# Altium PCB AD5940PSTAT.PcbDoc
Units mm, origin at the board's own origin, x right, y up, seen from the top; angles counter-clockwise.
Board outline 27 x 27 mm, 2 copper layers (Top Layer, Bottom Layer); 70 components, 59 nets, 300 pads, 134 vias.
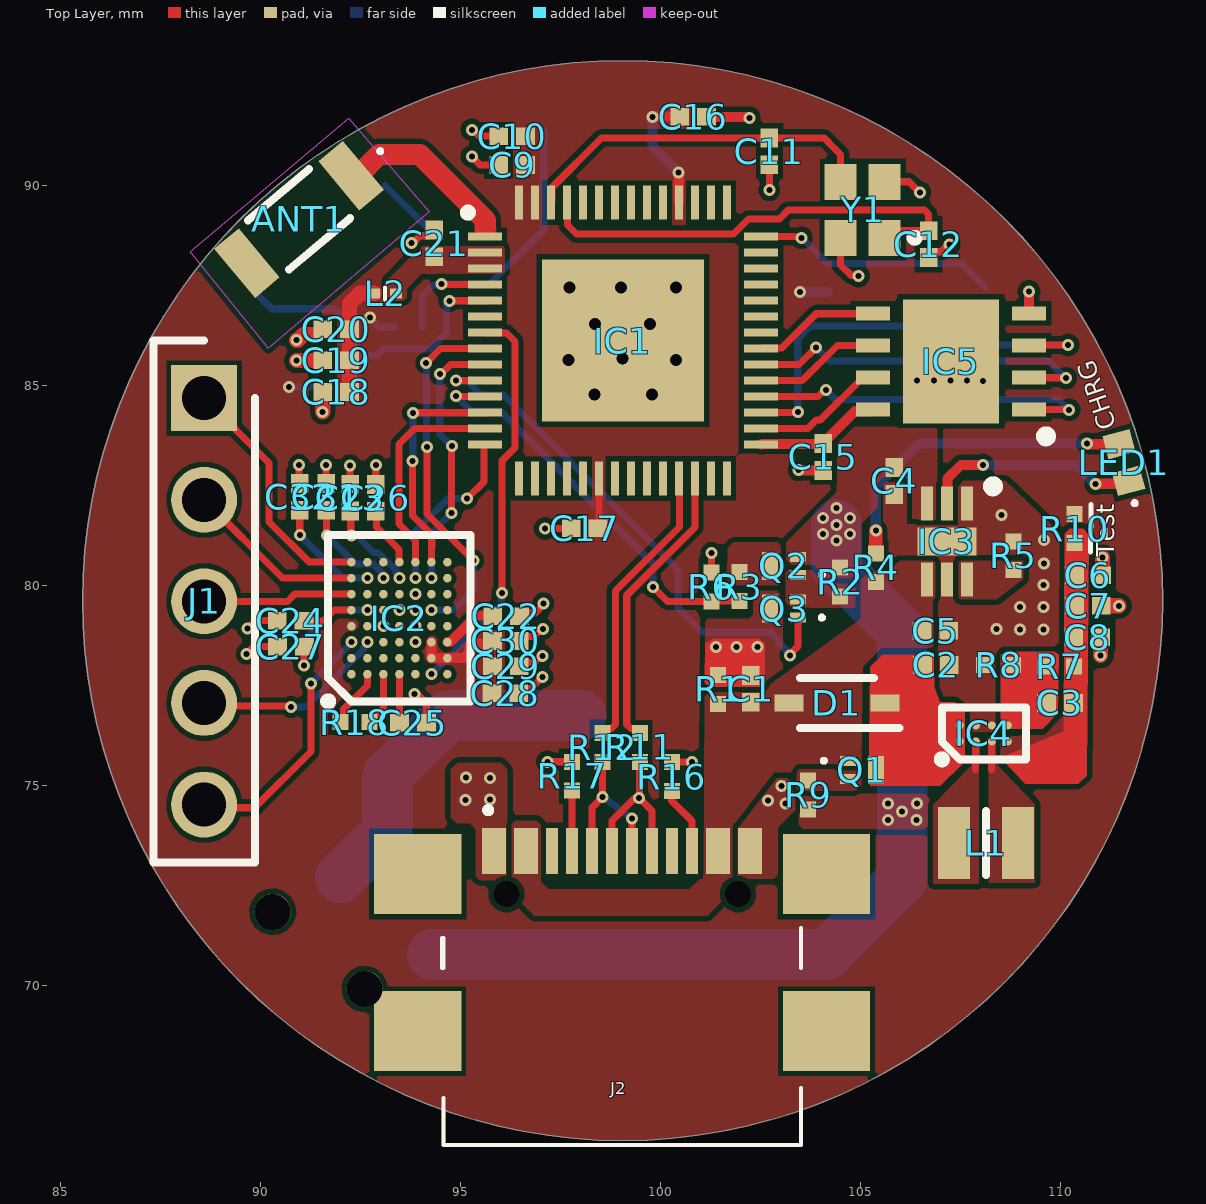
[diagram p0: Top Layer view]
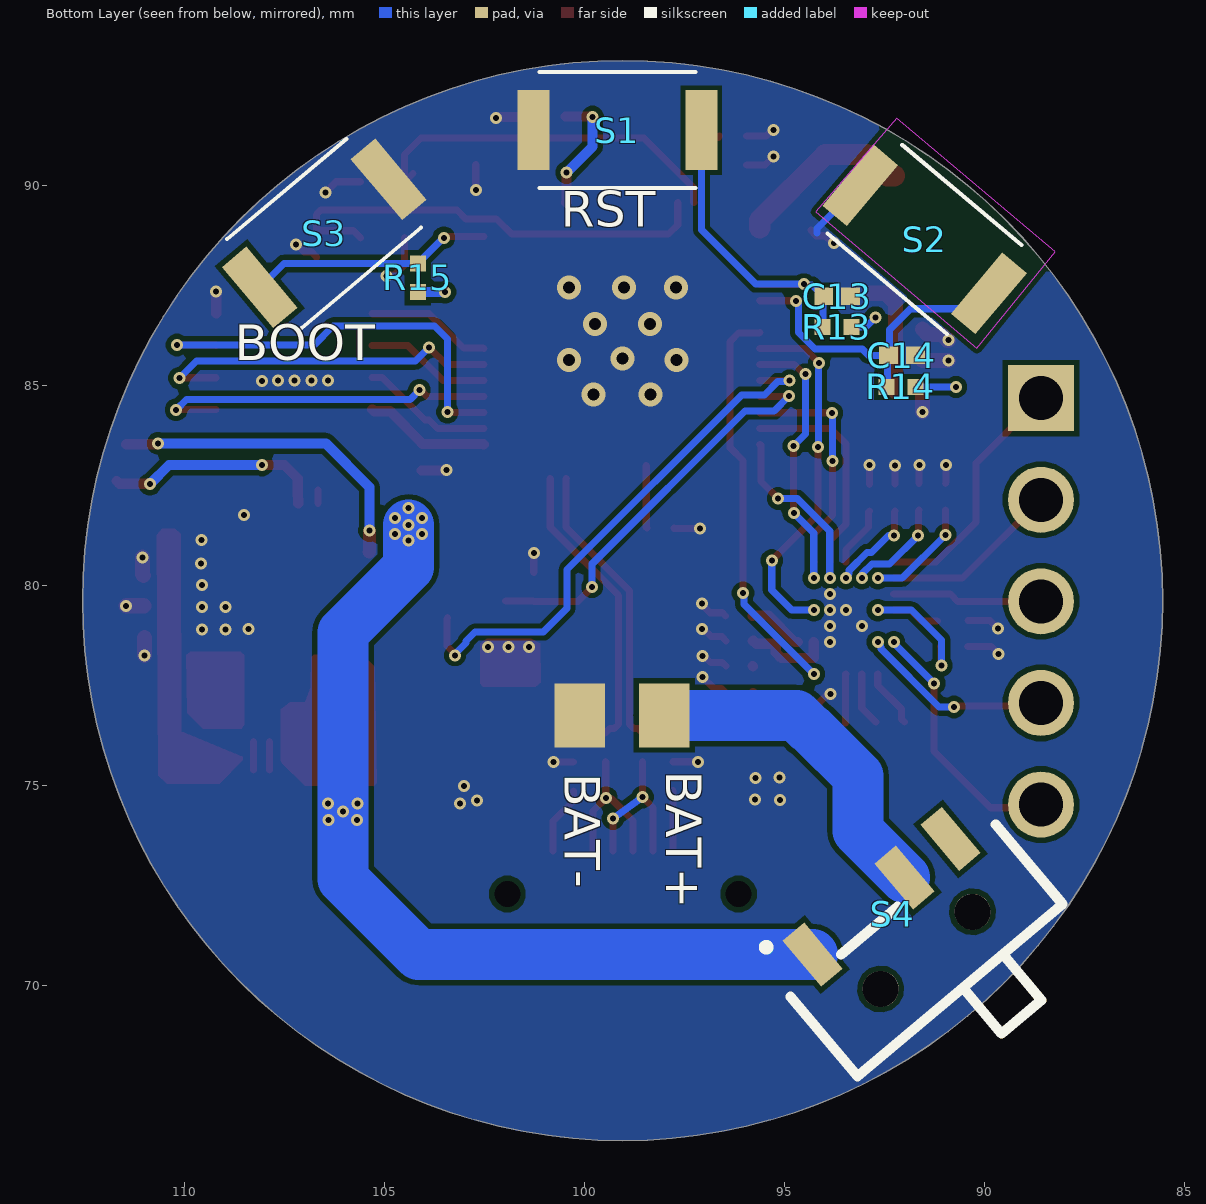
[diagram p1: Bottom Layer view, seen from below]
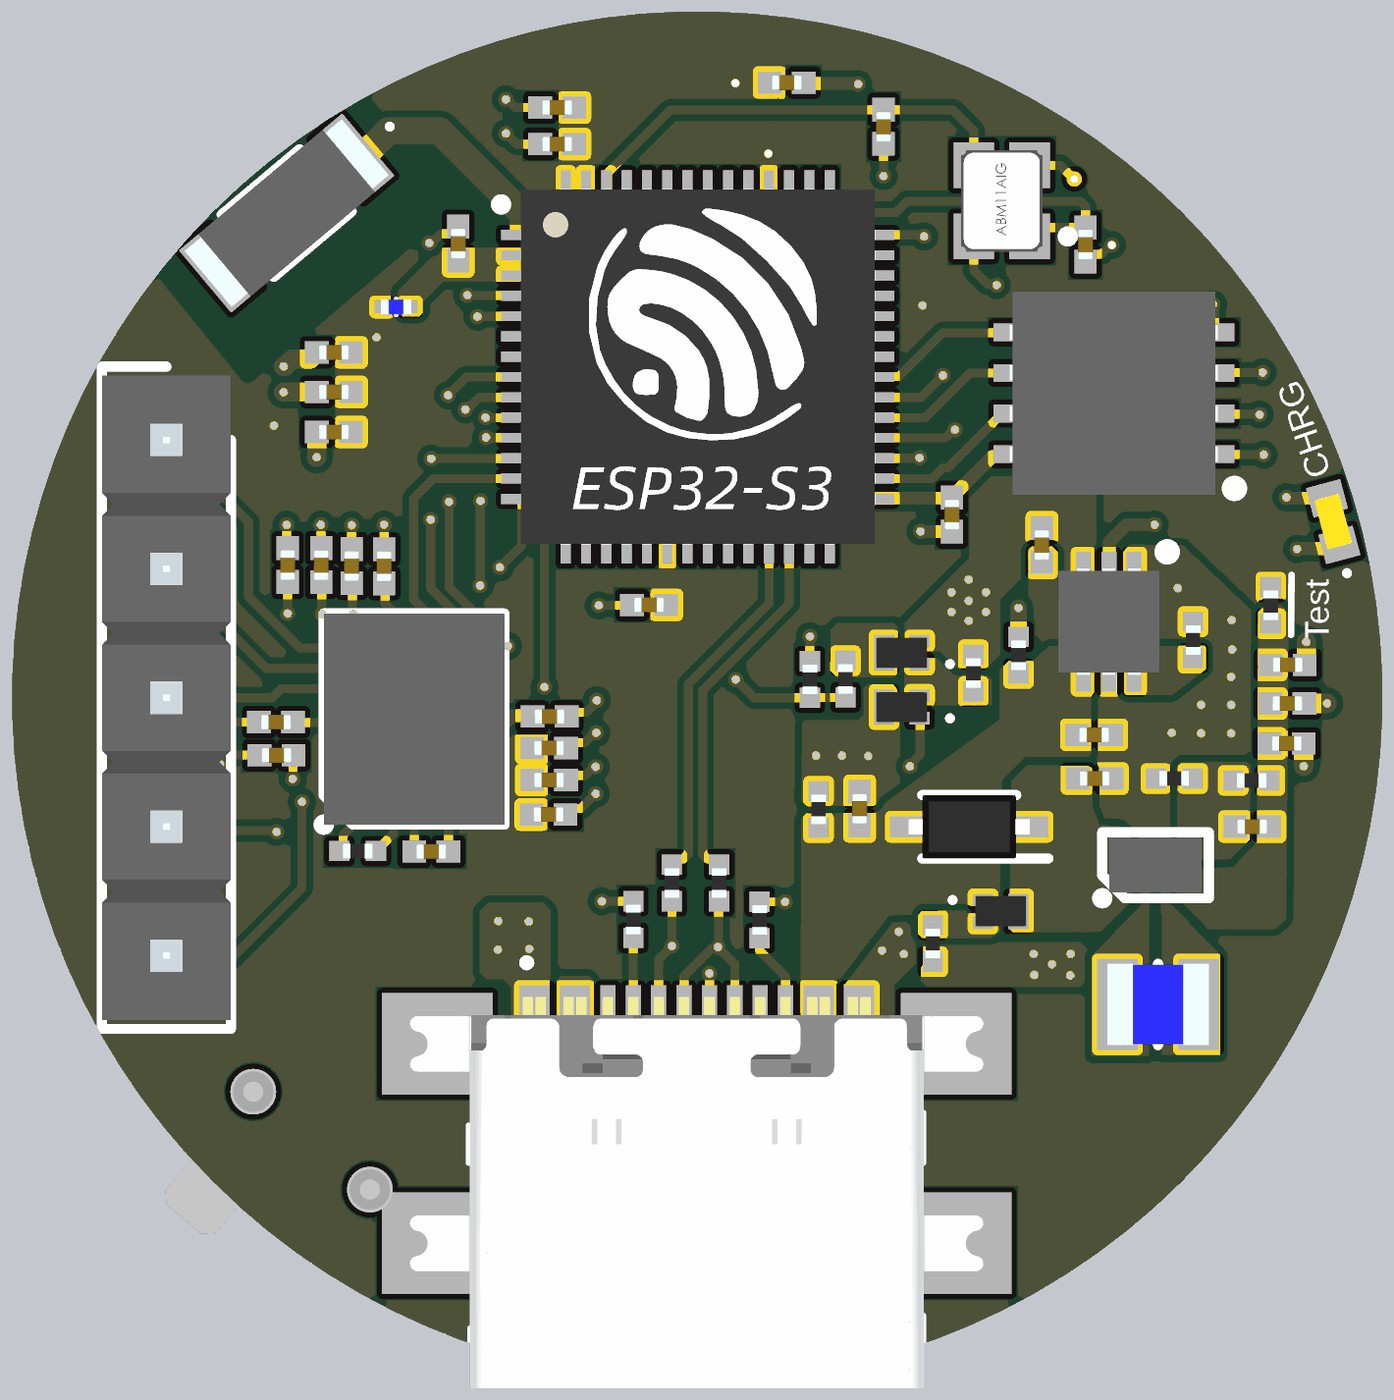
[diagram p2: 3D render of the assembled board from above, using the file's embedded part models]
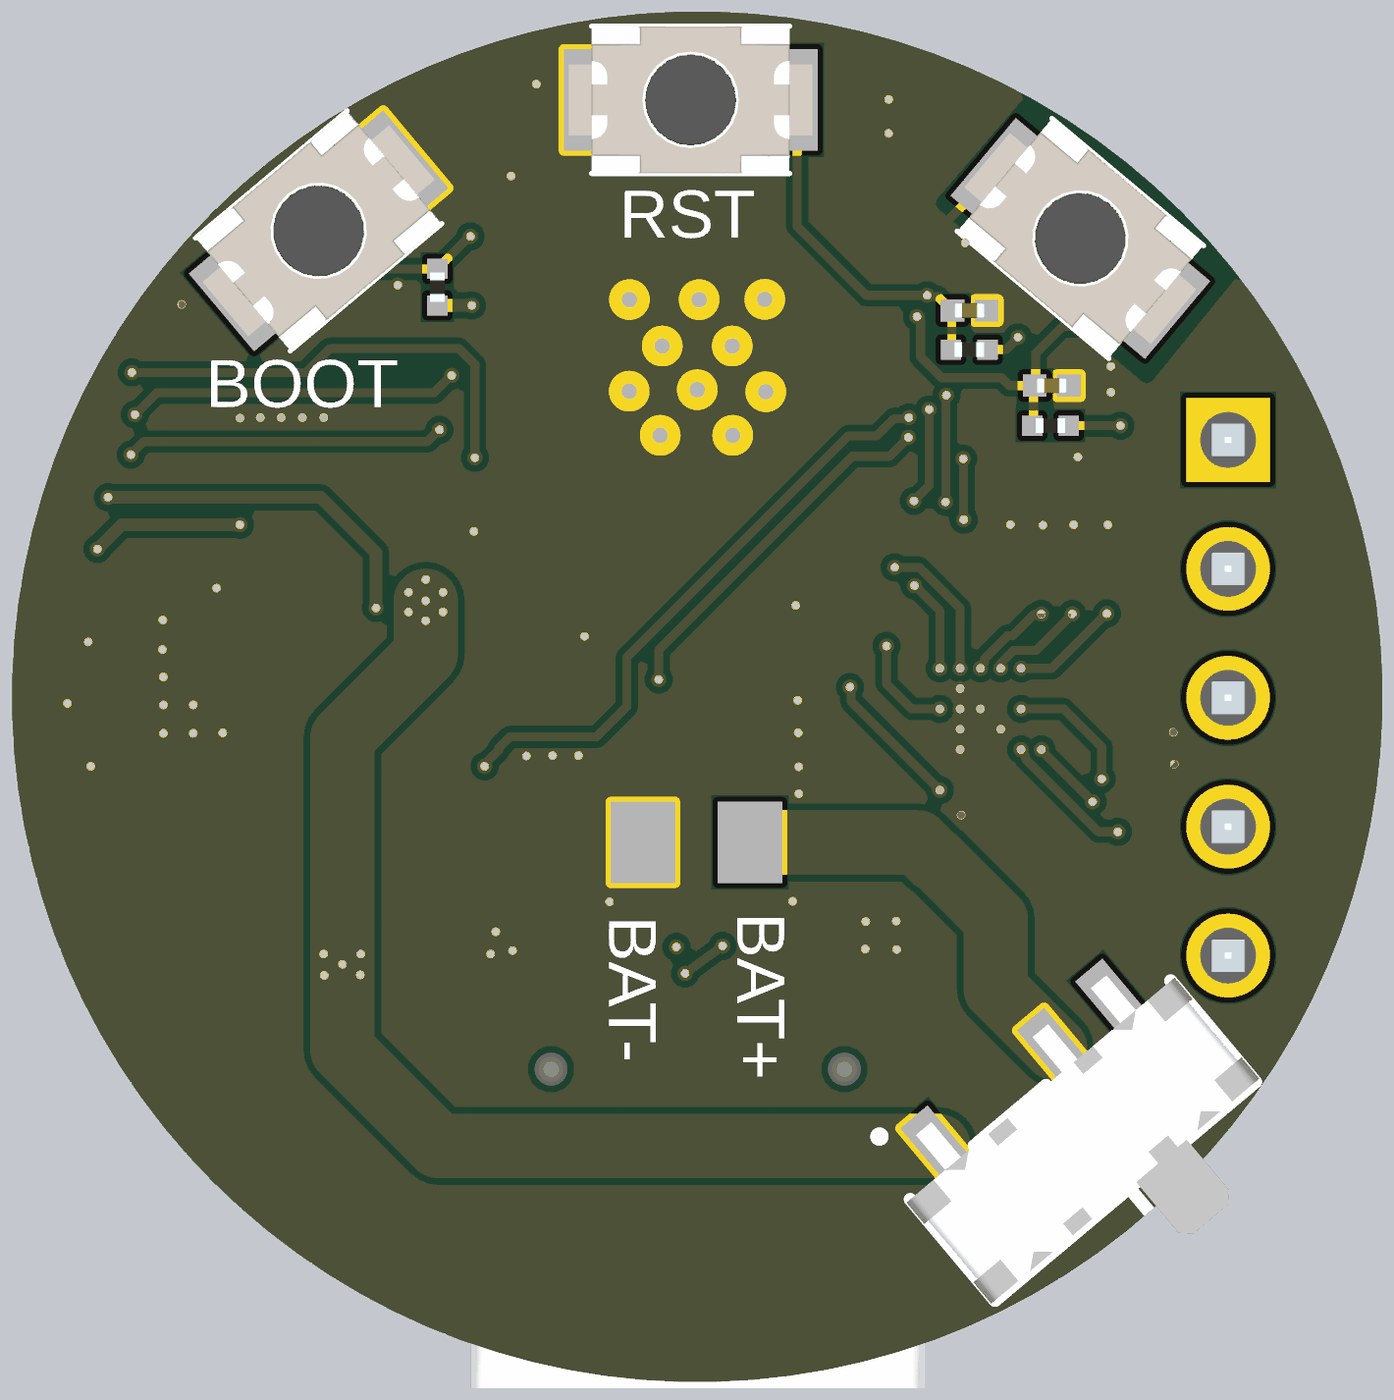
[diagram p3: 3D render of the assembled board from below, using the file's embedded part models]

## Layer stack, top to bottom
Top Solder: solder mask 0.0102, Solder Resist, Dk 3.5
Top Layer: signal copper 0.0356
Dielectric 1: dielectric 0.32, FR-4, Dk 4.8
Bottom Layer: signal copper 0.0356
Bottom Solder: solder mask 0.0102, Solder Resist, Dk 3.5

## Board outline
85.56,79.629 ccw(c99.06,79.629) 99.06,66.129 ccw(c99.06,79.629) 112.56,79.629 ccw(c99.06,79.629) 99.06,93.129 ccw(c99.06,79.629)

## Design rules (kind name [scope] priority, off if disabled: settings)
Clearance [All] p1: gap=0.127 ignorepadtopadclearanceinfootprint=FALSE
DiffPairsRouting [All] p1: maxlimit=0.254 minlimit=0.076 mostfreqgap=0.102 toplayer_minwidth=0.178 toplayer_maxwidth=0.178 toplayer_prefwidth=0.178 bottomlayer_minwidth=0.178 bottomlayer_maxwidth=0.178 bottomlayer_prefwidth=0.178 maxuncoupledlength=12.7
PlaneClearance [All] p1: clearance=0.127
PolygonConnect [All] p1: connectstyle=Direct reliefconductorwidth=0.254 reliefentries=4 polygonreliefangle="90 Angle" airgapwidth=0.254
RoutingVias [All] p1: holewidth=0.711 width=1.27 viastyle="Through Hole" minholewidth=0.711 minwidth=1.27 maxholewidth=0.711 maxwidth=1.27
SolderMaskExpansion [All] p1: expansion=0.102 istentingtop=FALSE
SupplyNets "Schematic Supply Nets" [InNet('GND')] p1: voltage=0.000
Width [All] p1: maxlimit=0.254 minlimit=0.076 preferedwidth=0.254 minimp=50.000000 maximp=50.000000 favimp=50.000000
28 further rules are at their usual default settings.

## Classes and differential pairs
component class AD5940: C22 C23 C24 C25 C26 C27 C28 C29 C30 C31 C32 IC2 J1 R18
component class AD5940PSTAT: ANT1 C9 C10 C11 C12 C13 C14 C15 C16 C17 C18 C19 C20 C21 IC1 IC5 J2 L2 R11 R12 R13 R14 R15 R16 R17 S1 S2 S3 Y1
component class Battery_MGMT: C1 C2 C3 C4 C5 C6 C7 C8 D1 IC3 IC4 L1 LED1 Q1 Q2 Q3 R1 R2 R3 R4 R5 R6 R7 R8 R9 R10 S4
differential pair ESP32_D: +ESP32_D_P -ESP32_D_N

## Components (designator, comment, footprint, x,y, rotation, side; value= is the part's Value field where it differs from the comment)
ANT1 "2450AT18A0100001E" 2450AT18A0100001E 90.97,89.16 r40 top
C1 "100nF 0201" CAPC0603X33N 102.26,77.425 r90 top
C2 "10uF 0201" CAPC0603X33N 106.89,78.02 r0 top
C3 "10pF 0201" CAPC0603X33N 109.995,77.07 r180 top
C4 "1uF 0201" CAPC0603X33N 105.85,82.62 r270 top
C5 "1uF 0201" CAPC0603X33N 106.88,78.88 r0 top
C6 "10uF 0201" CAPC0603X33N 110.695,80.26 r0 top
C7 "10uF 0201" CAPC0603X33N 110.689,79.498 r0 top
C8 "10uF 0201" CAPC0603X33N 110.675,78.71 r0 top
C9 "1uF 0201" CAPC0603X33N 96.3,90.52 r180 top
C10 "10nF 0201" CAPC0603X33N 96.3,91.24 r180 top
C11 "10pF 0201" CAPC0603X33N 102.73,90.86 r270 top
C12 "10pF 0201" CAPC0603X33N 106.71,88.54 r90 top
C13 "1uF 0201" CAPC0603X33N 93.695,87.24 r180 bottom
C14 "10pF 0201" CAPC0603X33N 92.075,85.76 r180 bottom
C15 "100nF 0201" CAPC0603X33N 104.08,83.22 r90 top
C16 "100nF 0201" CAPC0603X33N 100.825,91.73 r0 top
C17 "100nF 0201" CAPC0603X33N 98.11,81.44 r180 top
C18 "2.2uF 0201" CAPC0603X33N 91.9,84.845 r180 top
C19 "2.2uF 0201" CAPC0603X33N 91.9,85.635 r180 top
C20 "100nF 0201" CAPC0603X33N 91.9,86.415 r180 top
C21 "100nF 0201" CAPC0603X33N 94.35,88.56 r90 top
C22 "0.47uF 0201" CAPC0603X33N 96.15,79.24 r180 top
C23 "0.47uF 0201" CAPC0603X33N 92.25,82.205 r270 top
C24 "4u7F 0201" CAPC0603X33N 90.76,79.13 r0 top
C25 "0.47uF 0201" CAPC0603X33N 93.82,76.58 r180 top
C26 "0.47uF 0201" CAPC0603X33N 92.89,82.2 r270 top
C27 "220pF 0201" CAPC0603X33N 90.77,78.48 r0 top
C28 "10uF 0201" CAPC0603X33N 96.13,77.31 r180 top
C29 "0.1uF 0201" CAPC0603X33N 96.14,77.99 r180 top
C30 "0.1uF 0201" CAPC0603X33N 96.14,78.62 r180 top
C31 "0.1uF 0201" CAPC0603X33N 91.65,82.223 r270 top
C32 "1uF 0201" CAPC0603X33N 90.99,82.225 r270 top
D1 "RB551V-30-AU_R1_000A1" SODFL2512X90N 104.419,77.068 r180 top
IC1 "ESP32-S3" QFN40P700X700X90-57N-D 99.069,86.13 r0 top
IC2 "AD5940BCBZ-RL7" BGA56C40P8X7_416X356X55 93.48,79.19 r90 top
IC3 "LTC4065LEDC#TRMPBF" SON50P200X200X80-7N-D 107.17,81.11 r270 top
IC4 "TPS63036YFGR" BGA8C40P2X4_108X181X62 108.09,76.31 r90 top
IC5 "W25Q64JVXGIQ_TR" SON80P400X400X50-9N 107.27,85.61 r180 top
J1 "M20-9990546" HDRV5W64P0X254_1X5_1270X254X610P 88.6,84.69 r270 top
J2 "USB4110-GF-A" USB4110GFA 99.05,69.69 r0 top
L1 "DFE201612PD-1R5M=P2" 1286ASH1R0MP2 108.139,73.568 r0 top
L2 "2nH 0201" LQP03TG3N1B02D 93.125,87.31 r0 top
LED1 "VLMO1500-GS08" VLMO1500GS08 111.59,83.08 r105 top
Q1 "PMZ350UPEYL" PMZ350UPEYL 105.04,75.4 r0 top
Q2 "PMZ350UPEYL" PMZ350UPEYL 103.09,80.5 r180 top
Q3 "PMZ350UPEYL" PMZ350UPEYL 103.09,79.43 r180 top
R1 "100k 0201" RESC0603X28N 101.45,77.41 r90 top
R2 "100k 0201" RESC0603X28N 104.5,80.095 r270 top
R3 "100k 0201" RESC0603X28N 101.98,79.98 r270 top
R4 "500R 0201" RESC0603X28N 105.39,80.45 r90 top
R5 "2k 0201" RESC0603X28N 108.83,80.75 r90 top
R6 "10k 0201" RESC0603X28N 101.28,79.97 r90 top
R7 "287k 0201" RESC0603X28N 109.98,77.98 r180 top
R8 "51.1k 0201" RESC0603X28N 108.46,78.02 r180 top
R9 "0R 0201" RESC0603X28N 103.7,74.77 r90 top
R10 "0R 0201" RESC0603X28N 110.36,81.43 r90 top
R11 "22R 0201" RESC0603X28N 99.49,75.96 r90 top
R12 "22R 0201" RESC0603X28N 98.56,75.96 r90 top
R13 "10k 0201" RESC0603X28N 93.7,86.47 r180 bottom
R14 "10k 0201" RESC0603X28N 92.1,84.97 r180 bottom
R15 "10k 0201" RESC0603X28N 104.18,87.7 r270 bottom
R16 "5k1 0201" RESC0603X28N 100.29,75.23 r270 top
R17 "5k1 0201" RESC0603X28N 97.8,75.24 r270 top
R18 "200R 0201" RESC0603X28N 92.37,76.59 r180 top
S1 "SKRKAHE020" SKRKAEE020 99.19,91.39 r180 bottom
S2 "SKRKAHE020" SKRKAEE020 91.511,88.66 r220 bottom
S3 "SKRKAHE020" SKRKAEE020 106.52,88.81 r320 bottom
S4 "SSSS810701" SSSS810701 92.011,72.707 r140 bottom
Y1 "ABM11AIG-40.000MHZ-4Z-T3" ABM11AIG16000MHZ81ZT 105.06,89.4 r90 top

## Footprints (in the part's own frame and the unit in brackets; to place one, negate y for a bottom-side part, rotate by r counter-clockwise, add the part's x,y. Pads: shape width x height; smd on the part's side, far side on the other; paste and mask are expansions set on the pad)
1286ASH1R0MP2 [mm]
  rect 0.8x1.8 smd: 1(-0.8,0) 2(0.8,0)
  silkscreen extent 0,-0.8 0,0.8, body extent -1,-0.8 1,0.8, height 1.2
2450AT18A0100001E [mm]
  rect 0.8x1.6 smd: 1(1.7,0) 2(-1.7,0)
  silkscreen extent -1,-0.8 2.7,0.8, body extent -2.02,-0.8 2.02,0.8, height 1.5
ABM11AIG16000MHZ81ZT [mm]
  rect 0.9x0.8 smd: 1(-0.7,-0.55) 2(0.7,-0.55) 3(0.7,0.55) 4(-0.7,0.55)
  silkscreen extent -0.8,-1.4 -0.6,-1.2, body extent -1,-0.8 1,0.8, height 0.55
BGA8C40P2X4_108X181X62 [mm]
  round 0.2 smd: A1(-0.2,0.6) A2(0.2,0.6) B1(-0.2,0.2) B2(0.2,0.2) C1(-0.2,-0.2) C2(0.2,-0.2) D1(-0.2,-0.6) D2(0.2,-0.6)
  silkscreen extent -0.75,-1.05 0.65,1.15, body extent -0.54,-0.91 0.54,0.91, height 0.63
BGA56C40P8X7_416X356X55 [mm]
  round 0.214 smd: A1(-1.4,1.2) A2(-1,1.2) A3(-0.6,1.2) A4(-0.2,1.2) A5(0.2,1.2) A6(0.6,1.2) A7(1,1.2) A8(1.4,1.2) B1(-1.4,0.8) B2(-1,0.8) B3(-0.6,0.8) B4(-0.2,0.8) B5(0.2,0.8) B6(0.6,0.8) B7(1,0.8) B8(1.4,0.8) C1(-1.4,0.4) C2(-1,0.4) C3(-0.6,0.4) C4(-0.2,0.4) C5(0.2,0.4) C6(0.6,0.4) C7(1,0.4) C8(1.4,0.4) D1(-1.4,0) D2(-1,0) D3(-0.6,0) D4(-0.2,0) D5(0.2,0) D6(0.6,0) D7(1,0) D8(1.4,0) E1(-1.4,-0.4) E2(-1,-0.4) E3(-0.6,-0.4) E4(-0.2,-0.4) E5(0.2,-0.4) E6(0.6,-0.4) E7(1,-0.4) E8(1.4,-0.4) F1(-1.4,-0.8) F2(-1,-0.8) F3(-0.6,-0.8) F4(-0.2,-0.8) F5(0.2,-0.8) F6(0.6,-0.8) F7(1,-0.8) F8(1.4,-0.8) G1(-1.4,-1.2) G2(-1,-1.2) G3(-0.6,-1.2) G4(-0.2,-1.2) G5(0.2,-1.2) G6(0.6,-1.2) G7(1,-1.2) G8(1.4,-1.2)
  silkscreen extent -2.18,-1.78 2.08,1.88, body extent -2.08,-1.78 2.08,1.78, height 0.55
CAPC0603X33N [mm]
  rect 0.47x0.44 smd: 1(-0.335,0) 2(0.335,0)
  body extent -0.3,-0.15 0.3,0.15, height 0.33
HDRV5W64P0X254_1X5_1270X254X610P [mm]
  rect 1.65x1.65 hole 1.1: 1(0,0)
  round 1.65 hole 1.1: 2(2.54,0) 3(5.08,0) 4(7.62,0) 5(10.16,0)
  silkscreen extent -1.45,-1.27 11.61,1.27, body extent -1.27,-1.27 11.43,1.27, height 6.1
LQP03TG3N1B02D [mm]
  rect 0.3x0.25 smd: 1(-0.275,0) 2(0.275,0)
  silkscreen extent 0,-0.15 0,0.15, body extent -0.3,-0.15 0.3,0.15, height 0.33
PMZ350UPEYL [mm]
  rect 0.4x0.25 smd: 1(-0.35,0.225) 2(-0.35,-0.225)
  rect 0.4x0.7 smd: 3(0.35,0)
  silkscreen extent -1,0.18 -0.9,0.27, body extent -0.5,-0.3 0.5,0.3, height 0.48
QFN40P700X700X90-57N-D [mm]
  rect 0.85x0.2 smd: 1(-3.45,2.6) 2(-3.45,2.2) 3(-3.45,1.8) 4(-3.45,1.4) 5(-3.45,1) 6(-3.45,0.6) 7(-3.45,0.2) 8(-3.45,-0.2) 9(-3.45,-0.6) 10(-3.45,-1) 11(-3.45,-1.4) 12(-3.45,-1.8) 13(-3.45,-2.2) 14(-3.45,-2.6) 29(3.45,-2.6) 30(3.45,-2.2) 31(3.45,-1.8) 32(3.45,-1.4) 33(3.45,-1) 34(3.45,-0.6) 35(3.45,-0.2) 36(3.45,0.2) 37(3.45,0.6) 38(3.45,1) 39(3.45,1.4) 40(3.45,1.8) 41(3.45,2.2) 42(3.45,2.6)
  rect 0.2x0.85 smd: 15(-2.6,-3.45) 16(-2.2,-3.45) 17(-1.8,-3.45) 18(-1.4,-3.45) 19(-1,-3.45) 20(-0.6,-3.45) 21(-0.2,-3.45) 22(0.2,-3.45) 23(0.6,-3.45) 24(1,-3.45) 25(1.4,-3.45) 26(1.8,-3.45) 27(2.2,-3.45) 28(2.6,-3.45) 43(2.6,3.45) 44(2.2,3.45) 45(1.8,3.45) 46(1.4,3.45) 47(1,3.45) 48(0.6,3.45) 49(0.2,3.45) 50(-0.2,3.45) 51(-0.6,3.45) 52(-1,3.45) 53(-1.4,3.45) 54(-1.8,3.45) 55(-2.2,3.45) 56(-2.6,3.45)
  rect 4.05x4.05 smd: 57(0,0)
  silkscreen extent -3.97,3.1 -3.78,3.3, body extent -3.5,-3.5 3.5,3.5, height 1.02
RESC0603X28N [mm]
  rect 0.4x0.4 smd: 1(-0.36,0) 2(0.36,0)
  body extent -0.29,-0.15 0.29,0.15, height 0.28
SKRKAEE020 [mm]
  rect 0.8x2 smd: 1(-2.1,0) 2(2.1,0)
  silkscreen extent -1.95,-1.45 1.95,1.45, body extent -2.4,-1.45 2.4,1.45, height 2
SODFL2512X90N [mm]
  rect 0.72x0.42 smd: 1(-1.2,0) 2(1.2,0)
  silkscreen extent -1.56,-0.63 0.92,0.63, body extent -1.19,-0.63 1.19,0.63, height 0.8
SON50P200X200X80-7N-D [mm]
  rect 0.85x0.3 smd: 1(-0.95,0.5) 2(-0.95,0) 3(-0.95,-0.5) 4(0.95,-0.5) 5(0.95,0) 6(0.95,0.5)
  rect 0.7x1.47 smd: 7(0,0)
  silkscreen extent -1.5,1.03 -1.25,1.28, body extent -1.05,-1 1.05,1, height 0.8
SON80P400X400X50-9N [mm]
  rect 0.85x0.35 smd: 1(-1.95,1.2) 2(-1.95,0.4) 3(-1.95,-0.4) 4(-1.95,-1.2) 5(1.95,-1.2) 6(1.95,-0.4) 7(1.95,0.4) 8(1.95,1.2)
  rect 2.4x3.1 smd: 9(0,0)
  silkscreen extent -2.5,1.75 -2.25,2, body extent -2.05,-2 2.05,2, height 0.5
SSSS810701 [mm]
  rect 0.7x1.5 smd: 1(-3,0) 2(0,0) 3(1.5,0)
  round 0.9 hole 0.9 unplated: 4(-2.25,-1.75) 5(0.75,-1.75)
  silkscreen extent -4.1,-4.55 2.6,0.94, body extent -4.2,-4.55 2.7,0.45, height 1.4
USB4110GFA [mm]
  rect 0.3x1.15 smd: A1(-3.35,3.678) A4(-2.55,3.678) A5(-1.25,3.678) A6(-0.25,3.678) A7(0.25,3.678) A8(1.25,3.678) A9(2.55,3.678) A12(3.35,3.678) B1(3.05,3.678) B4(2.25,3.678) B5(1.75,3.678) B6(0.75,3.678) B7(-0.75,3.678) B8(-1.75,3.678) B9(-2.25,3.678) B12(-3.05,3.678)
  round 0.325 hole 0.65 unplated: MH1(-2.89,2.603) MH2(2.89,2.603)
  rect 2.18x2 smd: MP1(-5.11,-0.827) MP2(5.11,-0.827) MP3(-5.11,3.103) MP4(5.11,3.103)
  silkscreen extent -4.5,-3.68 4.47,4.75, body extent -5.65,-3.68 5.65,4.02, height 3.26
VLMO1500GS08 [mm]
  rect 0.6x0.7 smd: 1(-0.475,0) 2(0.475,0)
  silkscreen extent -1.1,-0.05 -1,0.05, body extent -0.5,-0.25 0.5,0.25, height 0.35

## Part data
ANT1: "Antenna", Manufacturer_Name="JOHANSON TECHNOLOGY", Datasheet Link=https://www.johansontechnology.com/datasheets/2450AT18A100/2450AT18A100.pdf, Height=1.4mm, Manufacturer_Part_Number=2450AT18A0100001E
C1 C2 C3 C4 C5 C6 C7 C8 C9 C10 C11 C12 C13 C14 C15 C16 C17 C18 C19 C20 C21 C22 C23 C24 C25 C26 C27 C28 C29 C30 C31 C32: library part 02013A0R5BAT2A, "Capacitor", Manufacturer_Name="Kyocera AVX", Mouser Part Number=581-02013A0R5BAT2A, Datasheet Link=http://www.mouser.com/catalog/supplier/library/pdf/AVXSurfaceMountCeramic.pdf, Height=0.33mm, Manufacturer_Part_Number=02013A0R5BAT2A, Mouser Price/Stock=https://www.mouser.co.uk/ProductDetail/KYOCERA-AVX/02013A0R5BAT2A?qs=Thry1QCnmXDPtFIq9lj3NA%3D%3D
D1: "Schottky Diode", Manufacturer_Name=PANJIT, Mouser Part Number=241-RB551V30AUR1000A, Datasheet Link=https://www.panjit.com.tw/upload/datasheet/RB551V-30-AU.pdf, Height=0.9mm, Manufacturer_Part_Number=RB551V-30-AU_R1_000A1, Mouser Price/Stock=https://www.mouser.co.uk/ProductDetail/Panjit/RB551V-30-AU_R1_000A1?qs=sPbYRqrBIVm52pGNMRAOZw%3D%3D
IC1: "Integrated Circuit", Manufacturer_Name="Espressif Systems", Mouser Part Number=356-ESP32-S3, Datasheet Link=https://nl.mouser.com/datasheet/2/891/Espressif_ESP32_S3_Datasheet-2904763.pdf, Height=0.9mm, Manufacturer_Part_Number=ESP32-S3, Mouser Price/Stock=https://www.mouser.co.uk/ProductDetail/Espressif-Systems/ESP32-S3?qs=Rp5uXu7WBW%2FNWuUy%252BBihNw%3D%3D
IC2: "Integrated Circuit", Manufacturer_Name="Analog Devices", Mouser Part Number=584-AD5940BCBZ-RL7, Arrow Part Number=AD5940BCBZ-RL7, Arrow Price/Stock=https://www.arrow.com/en/products/ad5940bcbz-rl7/analog-devices?region=nac, Datasheet Link=https://www.analog.com/media/en/technical-documentation/data-sheets/AD5940-5941.pdf, Height=0.55mm, Manufacturer_Part_Number=AD5940BCBZ-RL7, Mouser Price/Stock=https://www.mouser.co.uk/ProductDetail/Analog-Devices/AD5940BCBZ-RL7?qs=vLWxofP3U2xw9N0DLKMjhg%3D%3D
IC3: "Integrated Circuit", Manufacturer_Name="Analog Devices", Mouser Part Number=584-C4065LEDCTRMPBF, Arrow Part Number=LTC4065LEDC#TRMPBF, Arrow Price/Stock=https://www.arrow.com/en/products/ltc4065ledctrmpbf/analog-devices, Datasheet Link=https://www.analog.com/media/en/technical-documentation/data-sheets/LTC4065L-4065LX-4065L-4.1-4065LX-4.1.pdf, Height=0.8mm, Manufacturer_Part_Number=LTC4065LEDC#TRMPBF, Mouser Price/Stock=https://www.mouser.co.uk/ProductDetail/Analog-Devices/LTC4065LEDCTRMPBF?qs=hVkxg5c3xu8%2FWtpri9P%2FRQ%3D%3D
IC4: "Integrated Circuit", Manufacturer_Name="Texas Instruments", Mouser Part Number=595-TPS63036YFGR, Arrow Part Number=TPS63036YFGR, Arrow Price/Stock=https://www.arrow.com/en/products/tps63036yfgr/texas-instruments?region=nac, Datasheet Link=http://www.ti.com/lit/gpn/tps63036, Height=0.625mm, Manufacturer_Part_Number=TPS63036YFGR, Mouser Price/Stock=https://www.mouser.co.uk/ProductDetail/Texas-Instruments/TPS63036YFGR?qs=VMlqFFbv3sRsnODi5hD5bA%3D%3D
IC5: "Integrated Circuit", Arrow Part Number="W25Q64JVXGIQ TR", Manufacturer_Name=Winbond, Mouser Part Number=454-W25Q64JVXGIQTR, Arrow Price/Stock=https://www.arrow.com/en/products/w25q64jvxgiqtr/winbond-electronics?utm_currency=USD&region=nac, Datasheet Link=https://www.mouser.com/datasheet/2/949/w25q64jv_revj_03272018_plus-1489671.pdf, Height=0.5mm, Manufacturer_Part_Number="W25Q64JVXGIQ TR", Mouser Price/Stock=https://www.mouser.co.uk/ProductDetail/Winbond/W25Q64JVXGIQ-TR?qs=qSfuJ%252Bfl%2Fd5kgMLGcal3yA%3D%3D
J1: "Connector", Manufacturer_Name=Harwin, Mouser Part Number=855-M20-9990546, Datasheet Link=https://cdn.harwin.com/pdfs/M20-999.pdf, Height=6.1mm, Manufacturer_Part_Number=M20-9990546, Mouser Price/Stock=https://www.mouser.co.uk/ProductDetail/Harwin/M20-9990546?qs=ulE8k0yEMYY8EKyDN9ic6A%3D%3D
J2: "Connector", Manufacturer_Name="GCT (GLOBAL CONNECTOR TECHNOLOGY)", Mouser Part Number=640-USB4110-GF-A, Datasheet Link=https://gct.co/files/drawings/usb4110.pdf, Height=3.26mm, Manufacturer_Part_Number=USB4110-GF-A, Mouser Price/Stock=https://www.mouser.co.uk/ProductDetail/GCT/USB4110-GF-A?qs=KUoIvG%2F9IlYiZvIXQjyJeA%3D%3D
L1: "Capacitor", Arrow Part Number=DFE201612PD-1R5M=P2, Manufacturer_Name="Murata Electronics", Mouser Part Number=81-DFE201612PD1R5P2, Arrow Price/Stock=https://www.arrow.com/en/products/dfe201612pd-1r5mp2/murata-manufacturing, Datasheet Link=https://search.murata.co.jp/Ceramy/image/img/P02/J(E)TE243A-9101.pdf, Height=1.2mm, Manufacturer_Part_Number=DFE201612PD-1R5M=P2, Mouser Price/Stock=https://www.mouser.co.uk/ProductDetail/Murata-Electronics/DFE201612PD-1R5M%3dP2?qs=55YtniHzbhABc8Y8Zkr7yw%3D%3D
L2: library part LQP03TN2N0C02D, "Inductor", Manufacturer_Name="Murata Electronics", Mouser Part Number=81-LQP03TN2N0C02D, Arrow Part Number=LQP03TN2N0C02D, Arrow Price/Stock=https://www.arrow.com/en/products/lqp03tn2n0c02d/murata-manufacturing?region=nac, Datasheet Link=https://search.murata.co.jp/Ceramy/image/img/P02/JELF243C-0015.pdf, Height=0.33mm, Manufacturer_Part_Number=LQP03TN2N0C02D, Mouser Price/Stock=https://www.mouser.co.uk/ProductDetail/Murata-Electronics/LQP03TN2N0C02D?qs=e%252BE4OD6MgMf9XeFWsUHDiQ%3D%3D
LED1: "LED", Manufacturer_Name=Vishay, Mouser Part Number=78-VLMO1500-GS08, Arrow Part Number=VLMO1500-GS08, Arrow Price/Stock=https://www.arrow.com/en/products/vlmo1500-gs08/vishay, Datasheet Link=https://www.vishay.com/docs/82554/vlmo1500.pdf, Manufacturer_Part_Number=VLMO1500-GS08, Mouser Price/Stock=https://www.mouser.co.uk/ProductDetail/Vishay-Semiconductors/VLMO1500-GS08?qs=2BArZ0I3QlmyRfxEaZ%252BeBw%3D%3D
Q1 Q2 Q3: "MOSFET (P-Channel)", Manufacturer_Name=Nexperia, Mouser Part Number=771-PMZ350UPEYL, Arrow Part Number=PMZ350UPEYL, Arrow Price/Stock=https://www.arrow.com/en/products/pmz350upeyl/nexperia?utm_currency=USD&region=nac, Datasheet Link=https://assets.nexperia.com/documents/data-sheet/PMZ350UPE.pdf, Height=0.5mm, Manufacturer_Part_Number=PMZ350UPEYL, Mouser Price/Stock=https://www.mouser.co.uk/ProductDetail/Nexperia/PMZ350UPEYL?qs=8qdoF%2F2f1vquuPCxXPSa%252BA%3D%3D
R1 R2 R3 R4 R5 R6 R7 R8 R9 R10 R11 R12 R13 R14 R15 R16 R17 R18: library part CPF0201D422RE1, "Resistor", Manufacturer_Name="TE Connectivity", Datasheet Link=http://www.te.com/commerce/DocumentDelivery/DDEController?Action=showdoc&DocId=Data+Sheet%7F1773200-1%7FA%7Fpdf%7FEnglish%7FENG_DS_1773200-1_A.pdf%7F4-2176215-6, Height=0.28mm, Manufacturer_Part_Number=CPF0201D422RE1
S1 S2 S3: "Switch", Manufacturer_Name="ALPS Electric", Mouser Part Number=688-SKRKAHE010, Datasheet Link=https://www.alps.com/prod/info/E/HTML/Tact/SurfaceMount/SKRK/SKRKAHE020.html, Height=2mm, Manufacturer_Part_Number=SKRKAHE020, Mouser Price/Stock=https://www.mouser.co.uk/ProductDetail/Alps-Alpine/SKRKAHE020?qs=chTDxNqvsymUfAVYmcFXaw%3D%3D
S4: "Switch", Manufacturer_Name="ALPS Electric", Mouser Part Number=688-SSSS810701, Arrow Part Number=SSSS810701, Arrow Price/Stock=https://www.arrow.com/en/products/ssss810701/alps-electric, Datasheet Link=http://www.alps.com/prod/info/E/HTML/Switch/Slide/SSSS8/SSSS810701.html, Manufacturer_Part_Number=SSSS810701, Mouser Price/Stock=https://www.mouser.co.uk/ProductDetail/Alps-Alpine/SSSS810701?qs=uROlC5LSwk1OL7pdbC2yLg%3D%3D
Y1: "Crystal or Oscillator", Manufacturer_Name=ABRACON, Mouser Part Number=815-M11AIG-40-4ZT3, Datasheet Link=https://abracon.com/AIGcrystals/ABM11AIG.pdf, Height=0.55mm, Manufacturer_Part_Number=ABM11AIG-40.000MHZ-4Z-T3, Mouser Price/Stock=https://www.mouser.com/Search/Refine.aspx?Keyword=815-M11AIG-40-4ZT3

## Free pads (board coordinates)
  rect 1.27x1.6 smd far side: 2(98.02,76.76) 2(100.13,76.76)

## Via types
v1: diameter 0.3, hole 0.15, Top Layer to Bottom Layer, tented both sides, 107 vias
v2: diameter 0.3, hole 0.15, Top Layer to Bottom Layer, tented bottom, 16 vias
v3: diameter 0.6, hole 0.3, Top Layer to Bottom Layer, 10 vias
v4: diameter 0.3, hole 0.15, Top Layer to Bottom Layer, 1 vias

## Nets (pads, with @x,y where several pads share a name; then routed paths per layer and width w, separated by ;. In a path a pad name is that pad's centre, name@x,y a point inside that pad or via, vN(x,y) a via of type N, cw(c..) or ccw(c..) an arc to the next point about the centre after c; other vN are vias at no path point)
\: C14.1 IC1.5 R14.1 S2.2 | length 8.5
  Top Layer w0.178: v1(94.73,87.12) 94.735,87.125 95.625,87.125 IC1.5@95.63,87.13
  Bottom Layer w0.178: S2.2 90.288,86.925 91.865,86.925 92.39,86.4 92.39,85.78 C14.1 ; R14.1 92.435,84.995 92.435,85.735 C14.1 ; v1@94.73,87.13 94.66,87.06 94.66,86.33 94.247,85.917 93.067,85.917 92.911,85.76 C14.1
AIN1: IC2.B3 J1.4 | length 4.8
  Top Layer w0.178: J1.4 88.678,76.992 90.749,76.992 v1(90.773,76.968)
  Bottom Layer w0.178: v1(90.773,76.968) 91.148,76.968 92.595,78.415 92.595,78.472 92.68,78.557 v2(92.68,78.59)
AIN2: IC2.A3 J1.5 | length 6.4
  Top Layer w0.178: J1.5 88.68,74.45 89.86,74.45 91.27,75.86 v1(91.27,77.56)
  Bottom Layer w0.178: v1(91.27,77.56) 92.28,78.57 v2(92.28,78.59)
AIN3: C27.2 IC2.B5 | length 3
  Top Layer w0.178: v1(91.09,78.01) 91.098,78.017 91.098,78.473 C27.2
  Bottom Layer w0.178: v1(91.09,78.01) 91.09,78.64 91.84,79.39 v2(92.68,79.39)
ANT: ANT1.1 IC1.1 | length 4.4
  Top Layer w0.535: ANT1.1 92.443,90.253 92.97,90.78 93.99,90.78 95.63,89.14 95.63,88.95
AUX_BTN: IC1.42 R15.1 S3.2 | length 6.2
  Top Layer w0.178: IC1.42@102.53,88.73 103.467,88.73 103.497,88.7 v1(103.53,88.7)
  Bottom Layer w0.178: v1@103.5,88.71 103.53,88.71 R15.1 107.529,88.06 S3.2
AVDD_REG: C26.2 IC2.D8 | length 1.5
  Top Layer w0.178: C26.2 92.909,81.846 92.909,81.467 93.473,80.903 93.473,80.597 IC2.D8
CE0: IC2.A7 J1.2 | length 4.5
  Top Layer w0.178: J1.2 90.56,80.19 IC2.A7
CS: IC1.9 IC2.F7 | length 6.7
  Top Layer w0.178: v1(94.49,85.29) 94.523,85.29 94.763,85.53 IC1.9@95.63,85.53 ; v1(94.78,81.82) 94.785,81.825 94.785,83.485 v1(94.79,83.49)
  Bottom Layer w0.178: v2(94.28,80.19) 94.28,81.32 v1(94.78,81.82) ; v1(94.49,85.29) 94.49,83.79 v1(94.79,83.49)
D+: J2.A6 J2.B6 R11.1 | length 4
  Top Layer w0.178: J2.A6 98.8,74.131 99.345,74.677 99.447,74.677 v1(99.47,74.7) ; R11.1 99.48,75.59 99.48,74.71 v1(99.47,74.7) ; J2.B6 99.8,74.37 v1(99.47,74.7)
D-: J2.A7 J2.B7 R12.1 | length 4.1
  Top Layer w0.178: J2.B7 98.3,74.46 v1(98.56,74.72) R12.1 ; J2.A7 v1(99.3,74.18)
  Bottom Layer w0.178: v1(98.56,74.72) v1(99.3,74.18)
DVDD_REG1v8: C22.2 IC2.G3 | length 1.4
  Top Layer w0.254: IC2.G3 94.75,78.59 95.42,79.26 95.795,79.26 C22.2
ESP32_D_N: IC1.25 R12.2 | length 7.2
  Top Layer w0.178: R12.2 98.671,76.431 98.781,76.431 98.885,76.535 98.885,79.876 100.479,81.47 100.479,82.67 IC1.25
ESP32_D_P: IC1.26 R11.2 | length 7.3
  Top Layer w0.178: R11.2 99.379,76.431 99.269,76.431 99.165,76.535 99.165,79.761 100.869,81.465 IC1.26
GND: C1.2 C2.2 C4.2 C5.2 C6.2 C7.2 C8.2 C9.2 C10.2 C11.2 C12.1 C13.2 C14.2 C15.1 C16.2 C17.2 C18.2 C19.2 C20.2 C21.2 C22.1 C23.1 C24.1 C25.1 C26.1 C27.1 C28.1 C29.1 C30.1 C31.1 C32.1 IC1.57 IC2.C4 IC2.D5 IC2.E3 IC2.E4 IC2.E5 IC2.E6 IC3.1 IC3.5 IC3.7 IC4.B2 IC4.C2 IC5.4 IC5.9 J2.A1 J2.A12 J2.B1 J2.B12 pad.2@100.13,76.76 Q3.3 R1.2 R5.2 R6.2 R8.2 R16.1 R17.1 S1.1 S2.1 S3.1 Y1.2 Y1.4 | length 22.6
  Top Layer w0.178: v1(89.66,78.3) 89.84,78.48 C27.1 ; v1(89.68,78.93) 89.88,79.13 C24.1 ; v1(90.97,83.018) 90.97,82.58 C32.1 ; v1(91.643,83.019) 91.646,83.016 91.646,82.561 C31.1 ; C23.1 v1(92.25,83.01) ; C26.1 v1(92.89,83.02) ; v1(93.78,88.57) 93.813,88.57 93.992,88.749 94.219,88.749 94.35,88.88 C21.2 ; v1(93.86,77.3) 93.883,77.277 93.945,77.277 94.155,77.067 C25.1 ; v1(95.29,90.73) 95.5,90.52 C9.2 ; v1(95.29,91.4) 95.31,91.4 95.47,91.24 C10.2 ; C28.1 96.585,77.43 96.77,77.43 v1(97.06,77.72) ; C29.1 96.567,78.082 96.859,78.082 97.027,78.25 v1(97.06,78.25) ; C30.1 96.582,78.727 96.844,78.727 97.037,78.92 v1(97.07,78.92) ; C22.1 96.571,79.326 96.876,79.326 97.08,79.53 v1(97.08,79.56) ; v1(97.12,81.43) 97.125,81.435 97.77,81.435 C17.2 ; v1(97.18,75.6) R17.1 ; R16.1 v1(100.79,75.59) ; C16.2 C16.2@101.175,91.715 ; R6.2 v1(101.28,80.82) ; v1@102.215,91.715 v1(102.23,91.7) ; v1(102.73,89.89) C11.2 ; Y1.4 104.51,88.02 104.767,87.763 104.937,87.763 v1(104.96,87.74) ; Y1.2 106.22,90.1 v4(106.49,89.83) ; C12.1 106.71,88.22 106.841,88.351 107.018,88.351 107.197,88.53 v1(107.23,88.53) ; C8.2 C8.2@111.015,78.705 ; C7.2 C7.2@111.028,79.494 ; C6.2 C6.2@111.035,80.255
  Top Layer w0.254: C16.2@101.175,91.715 v1@102.215,91.715 ; v1(103.46,82.89) 103.465,82.885 C15.1 ; IC5.4 v1(109.22,87.36)
  Top Layer w0.381: v1(90.91,85.63) 90.913,85.632 91.562,85.632 C19.2 ; v1(90.91,86.14) 90.943,86.14 91.087,86.284 91.434,86.284 C20.2 ; v1(91.56,84.35) 91.562,84.352 91.562,84.842 C18.2 ; v1(111.01,78.26) 111.01,78.7 C8.2@111.015,78.705 ; C7.2@111.028,79.494 111.034,79.5 v1(111.47,79.5) ; C6.2@111.035,80.255 111.06,80.28 v1(111.06,80.71)
  Bottom Layer w0.178: S2.1 94.2,88.93 94.2,88.82
  other v1: 103.13,74.56 102.7,74.63 95.13,74.65 95.75,74.66 103.03,75 95.14,75.21 95.74,75.2 101.4,78.47 101.91,78.47 102.427,78.463 108.41,78.92 108.99,78.91 109.58,78.91 108.99,79.47 109.58,79.47 109.58,80.02 109.6,80.56 109.59,81.14 108.53,81.77 108.07,85.12 106.42,85.13 106.84,85.13 107.26,85.13 107.67,85.13
  other v2: 93.88,78.59 93.08,78.99 93.88,78.99 93.48,79.39 93.88,79.39 93.88,79.79
  other v3: 98.36,84.78 99.79,84.78 97.71,85.64 100.4,85.65 99.06,85.68 98.37,86.54 99.75,86.54 97.73,87.46 99.023,87.453 100.396,87.456
GPIO_INT: IC1.8 IC2.F5 | length 9.1
  Top Layer w0.178: v1(94.15,85.57) 94.51,85.93 IC1.8@95.63,85.93 ; v1(94.17,83.47) 94.17,81.79 v1(95.33,80.63)
  Bottom Layer w0.178: v1(94.15,85.57) 94.16,85.56 94.16,83.48 v1(94.17,83.47) ; v2(94.28,79.39) 94.83,79.39 95.33,79.89 v1(95.33,80.63)
GPIO_RST: IC1.7 IC2.F1 | length 10
  Top Layer w0.178: IC1.7@95.63,86.33 95.641,86.319 96.161,86.319 96.37,86.11 96.37,83.45 96.05,83.13 v1(96.05,79.82)
  Bottom Layer w0.178: v2(94.28,77.79) 96.027,79.537 96.027,79.797 v1(96.05,79.82)
MISO: IC1.13 IC2.E8 | length 5.4
  Top Layer w0.178: IC2.E8 93.88,81.13 93.47,81.54 93.47,83.54 93.86,83.93 IC1.13@95.63,83.93
MOSI: IC1.14 IC2.E7 | length 4.4
  Top Layer w0.178: v1(95.17,82.18) 95.6,82.61 95.6,83.519 95.619,83.519 IC1.14@95.63,83.53
  Bottom Layer w0.178: v2(93.88,80.19) 93.88,81.366 94.694,82.18 v1(95.17,82.18)
NetC2_1: C2.1 D1.1 IC4.A1 IC4.A2 Q1.3
NetC3_1: C3.1 C6.1 C7.1 C8.1 IC4.D1 R7.1 R10.1
NetC3_2: C3.2 IC4.D2 R7.2 R8.1
NetC11_1: C11.1 IC1.54 Y1.3 | length 9.3
  Top Layer w0.178: IC1.54@97.28,89.58 97.291,89.591 97.291,89.95 98.532,91.19 102.73,91.19 103.285,91.19 104.1,91.19 104.335,90.955 104.51,90.78 Y1.3 Y1.3@104.3,90.31
NetC12_2: C12.2 IC1.53 Y1.1 | length 11.6
  Top Layer w0.178: IC1.53@97.68,89.58 97.68,89.02 97.91,88.79 101.832,88.79 102.211,89.17 102.98,89.17 103.2,89.39 106.606,89.39 106.71,89.286 C12.2 105.785,88.875 Y1.1
NetC21_1: C21.1 IC1.2 IC1.3 L2.2
NetC31_2: C31.2 IC2.C7 | length 2.5
  Top Layer w0.178: C31.2 91.66,81.878 91.66,81.27 v1(91.67,81.26)
  Bottom Layer w0.178: v1(91.67,81.26) 92.387,80.543 92.826,80.543 93.071,80.298 93.071,80.199 v2(93.08,80.19)
NetC32_2: C32.2 IC2.B7 | length 2.8
  Top Layer w0.178: v1(90.99,81.27) C32.2
  Bottom Layer w0.178: v1(90.99,81.27) 92.07,80.19 v2(92.68,80.19)
NetIC1_10: IC1.10 Q3.1 | length 13.6
  Top Layer w0.178: v1(94.89,85.13) IC1.10@95.63,85.13 ; v1(103.25,78.26) 103.25,78.293 103.45,78.493 103.45,79.169 103.44,79.179 Q3.1
  Bottom Layer w0.178: v1(94.89,85.13) 94.913,85.107 95.18,85.107 95.516,84.77 96.08,84.77 100.446,80.404 100.446,79.437 101.043,78.84 102.75,78.84 102.975,78.615 102.975,78.568 103.25,78.293 v1(103.25,78.26)
NetIC1_11: IC1.11 R3.2 R6.1 | length 10.3
  Top Layer w0.178: v1(94.9,84.74) 94.905,84.735 95.625,84.735 IC1.11@95.627,84.733 ; v1(99.82,79.97) 100.18,79.61 R6.1 101.285,79.615 101.975,79.615 R3.2
  Bottom Layer w0.178: v1(94.9,84.74) 95.27,84.37 96,84.37 99.82,80.55 v1(99.82,79.97)
NetIC3_2: IC3.2 LED1.1 | length 5.5
  Top Layer w0.254: IC3.2 107.18,82.358 107.18,82.68 107.52,83.02 v1(108.072,83.02) ; v1(110.88,82.54) 110.889,82.549 111.641,82.549 LED1.1
  Bottom Layer w0.254: v1(108.072,83.02) 110.4,83.02 v1(110.88,82.54)
NetIC3_6: IC3.6 R5.1
NetIC4_B1: IC4.B1 L1.1 | length 0.7
  Top Layer w0.178: 107.883,75.393 IC4.B1
NetIC4_C1: IC4.C1 L1.2 | length 0.7
  Top Layer w0.178: 108.284,75.4 IC4.C1
NetJ2_A5: J2.A5 R17.2 | length 1.5
  Top Layer w0.178: J2.A5 R17.2
NetJ2_B5: J2.B5 R16.2 | length 1.7
  Top Layer w0.178: R16.2 100.29,74.622 100.8,74.112 J2.B5
NetLED1_2: LED1.2 R4.2 | length 8.3
  Top Layer w0.178: R4.2 R4.2@105.4,80.921
  Top Layer w0.254: v1(110.67,83.56) 110.682,83.56 110.704,83.539 LED1.2
  Top Layer w0.33: v1(105.39,81.38) 105.39,80.845 R4.2@105.4,80.845
  Bottom Layer w0.254: v1(105.39,81.38) 105.39,82.47 106.48,83.56 v1(110.67,83.56)
NetQ1_2: Q1.2 R9.2
NetQ2_1: Q2.1 Q3.2 R2.2
NetQ2_3: Q2.3 R3.1
RCAL0: IC2.C1 R18.1 | length 1.3
  Top Layer w0.178: R18.1 93.08,76.94 IC2.C1
RCAL1: IC2.B1 R18.2 | length 1.5
  Top Layer w0.178: R18.2 92.083,76.663 92.083,76.913 92.68,77.51 IC2.B1
RE0: IC2.A8 J1.1 | length 6.2
  Top Layer w0.178: J1.1 90.22,83.07 90.22,81.594 91.224,80.59 IC2.A8
RESET: C13.1 IC1.4 R13.1 S1.2 | length 8.1
  Top Layer w0.178: v1(94.53,87.54) 94.535,87.535 95.625,87.535 IC1.4@95.63,87.53
  Bottom Layer w0.178: R13.1 94.045,86.485 94.045,87.225 C13.1 94.045,87.24 94.322,87.517 94.507,87.517 v1(94.53,87.54) 95.73,87.54 97.09,88.9 S1.2
SCLK: IC1.12 IC2.F8 | length 5.8
  Top Layer w0.178: v1(93.81,83.12) 93.81,81.76 94.29,81.28 94.29,80.965 94.287,80.962 94.287,80.597 IC2.F8 ; v1(93.82,84.32) 93.825,84.325 95.625,84.325 IC1.12@95.63,84.33
  Bottom Layer w0.178: v1(93.81,83.12) 93.815,83.125 93.815,84.315 v1(93.82,84.32)
SPICLK: IC1.33 IC5.6 | length 3.2
  Top Layer w0.178: IC1.33@102.53,85.13 103.55,85.13 104.43,86.01 IC5.6
SPICS0: IC1.32 IC5.1 | length 9
  Top Layer w0.178: IC1.32@102.53,84.73 103.947,84.73 104.107,84.89 v1(104.14,84.89) ; IC5.1 109.225,84.405 110.215,84.405 v1(110.22,84.4)
  Bottom Layer w0.178: v1(104.14,84.89) 104.37,84.66 109.96,84.66 v1(110.22,84.4)
SPID: IC1.35 IC5.5 | length 3.2
  Top Layer w0.178: IC1.35@102.53,85.93 102.541,85.941 103.041,85.941 103.9,86.8 105.31,86.8 IC5.5
SPIHD: IC1.30 IC5.7 | length 3.3
  Top Layer w0.178: IC1.30@102.53,83.93 103.69,83.93 103.9,84.14 104,84.14 105.07,85.21 IC5.7
SPIQ: IC1.34 IC5.2 | length 9
  Top Layer w0.178: IC1.34@102.53,85.53 103.47,85.53 v1(103.9,85.96) ; IC5.2 109.23,85.2 110.13,85.2 v1(110.14,85.19)
  Bottom Layer w0.178: v1(103.9,85.96) 104.24,85.62 109.71,85.62 v1(110.14,85.19)
SPIWP: IC1.31 IC5.3 | length 10.8
  Top Layer w0.178: IC1.31@102.53,84.33 103.43,84.33 v1(103.44,84.34) ; IC5.3 109.225,86.015 110.196,86.015 v1(110.201,86.019)
  Bottom Layer w0.178: v1(103.44,84.34) 103.44,86.17 103.76,86.49 106.3,86.49 106.771,86.019 v1(110.201,86.019)
VBAT: C4.1 IC3.3 Q2.2 R2.1 R9.1 S4.1 | length 22.4
  Top Layer w0.178: IC3.3 IC3.3@106.67,82.396
  Bottom Layer w1.27: S4.1 104.158,70.778 106.05,72.67 106.05,78.83 104.41,80.47 v1(104.41,81.52)
  other v1: 105.7,74.15 106.41,74.14 106.05,74.36 105.69,74.56 106.42,74.56 104.41,81.13 104.07,81.3 104.75,81.3 104.07,81.69 104.75,81.69 104.41,81.94
VBAT_in: pad.2@98.02,76.76 S4.2 | length 8.5
  Bottom Layer w1.27: S4.2 93.177,73.873 93.177,75.245 94.343,76.411 94.369,76.411 94.718,76.76 pad.2@98.02,76.76
VBIAS_CAP: C25.2 IC2.D1 | length 1.2
  Top Layer w0.178: IC2.D1 93.485,77.785 93.485,76.575 C25.2@93.49,76.57
VCC_3v3: C9.1 C10.1 C16.1 C17.1 C18.1 C19.1 C20.1 C28.2 C29.2 C30.2 IC1.20 IC1.46 IC1.55 IC1.56 IC2.A4 IC2.F2 IC2.F3 IC2.G2 L2.1 R10.2 R13.2 R14.2 R15.2 | length 12.3
  Top Layer w0.178: C10.1 C10.1@96.669,91.206 ; C17.1 98.469,81.464 IC1.20 98.469,83.009 IC1.20@98.47,83.01
  Top Layer w0.254: IC2.F3 IC2.F2 IC2.G2 95.09,78.19 95.23,78.33 95.23,78.46 95.322,78.552 95.717,78.552 95.795,78.63 C30.2 ; C28.2 C28.2@95.797,77.312 ; C29.2@95.803,77.988 C29.2 ; v1(99.81,91.72) 99.82,91.73 C16.1 ; v1(100.46,90.33) 100.465,90.325 100.465,89.585 IC1.46
  Top Layer w0.381: C18.1 C20.1 92.235,87.055 92.49,87.31 L2.1
  Bottom Layer w0.178: v1(90.72,84.97) R14.2 ; v1(92.74,86.71) 92.977,86.473 93.337,86.473 R13.2
  Bottom Layer w0.254: v1(99.81,91.72) 99.81,90.98 v1(100.46,90.33) ; v1(103.5,87.34) R15.2
VDD_SPI: C15.2 IC1.29 IC5.8 | length 3.2
  Top Layer w0.254: IC1.29@102.53,83.53 102.543,83.542 104.067,83.542 C15.2 104.08,83.57 104.872,84.362 105.272,84.362 IC5.8
VREF_1v8: C24.2 IC2.A5 | length 1.2
  Top Layer w0.178: C24.2@91.19,79.12 91.59,79.12 91.86,79.39 IC2.A5
VREF_2v5: C23.2 IC2.D7 | length 2.4
  Top Layer w0.178: C23.2 92.265,81.855 92.265,81.275 v1(92.28,81.26)
  Bottom Layer w0.178: v1@92.25,81.26 92.41,81.26 92.835,80.835 92.947,80.835 93.395,80.387 93.395,80.308 93.48,80.223 v2(93.48,80.19)
VUSB: C1.1 C5.1 D1.2 IC3.4 J2.A4 J2.A9 J2.B4 J2.B9 Q1.1 R1.1 R4.1
WE0: IC2.A6 J1.3 | length 3.8
  Top Layer w0.178: J1.3 90.685,79.61 90.865,79.79 IC2.A6
pads on no net: ANT1.2 IC1.6 IC1.15 IC1.16 IC1.17 IC1.18 IC1.19 IC1.21 IC1.22 IC1.23 IC1.24 IC1.27 IC1.28 IC1.36 IC1.37 IC1.38 IC1.39 IC1.40 IC1.41 IC1.43 IC1.44 IC1.45 IC1.47 IC1.48 IC1.49 IC1.50 IC1.51 IC1.52 IC2.A1 IC2.A2 IC2.B2 IC2.B4 IC2.B6 IC2.B8 IC2.C2 IC2.C3 IC2.C5 IC2.C6 IC2.C8 IC2.D2 IC2.D3 IC2.D4 IC2.D6 IC2.E1 IC2.E2 IC2.F4 IC2.F6 IC2.G1 IC2.G4 IC2.G5 IC2.G6 IC2.G7 IC2.G8 J2.A8 J2.B8 J2.MH1 J2.MH2 J2.MP1 J2.MP2 J2.MP3 J2.MP4 S4.3 S4.4 S4.5

## Polygon pours and split planes (outlines as drawn)
GND on Top Layer "GND_L01_P017" (solid, pour order 17): 96.172,72.802 96.172,75.419 96.011,75.58 94.94,75.58 94.77,75.41 94.77,74.199 94.909,74.06 95.24,74.06 95.39,73.91 95.39,72.74 95.492,72.638 96.172,72.643
VCC_3v3 on Top Layer "VCC_3V3_L01_P029" (solid, pour order 29): 85.56,79.629 ccw(c99.06,79.629) 99.06,66.129 ccw(c99.06,79.629) 112.56,79.629 ccw(c99.06,79.629) 99.06,93.129 ccw(c99.06,79.629)
NetC21_1 on Top Layer "NETC21_1_L01_P028" (solid, pour order 28): 93.16,87.22 93.26,87.12 93.58,87.12 93.66,87.2 93.66,87.42 94.042,87.802 96.082,87.802 96.121,87.842 96.12,87.843 96.12,88.44 96.076,88.484 94.014,88.484 93.16,87.63
VCC_3v3 on Top Layer "VCC_3V3_L01_P022" (solid, pour order 22): 96.27,89.22 96.39,89.1 96.95,89.1 97.07,89.22 97.07,91.617 96.987,91.7 96.363,91.7 96.27,91.607
VBAT on Top Layer "VBAT_L01_P016" (solid, pour order 16): 103.467,74.023 103.467,74.698 103.569,74.8 106.612,74.8 106.74,74.672 106.74,74.05 106.6,73.91 103.58,73.91
ANT on Top Layer "ANT_L01_P020" (solid, pour order 20): 95.897,88.948 95.897,88.787 95.84,88.73 95.398,88.73 95.36,88.768 95.36,88.98
GND on Top Layer "GND_L01_P018" (solid, pour order 18): 102.55,77.48 103.06,77.871 103.06,79.79 102.93,79.92 102.451,79.92 102.331,79.8 102.331,79.271 102.23,79.17 101.19,79.17 101.121,79.101 101.121,78.557
GND on Top Layer "GND_L01_P015" (solid, pour order 15): 101.72,72.68 102.84,72.68 102.94,72.78 102.94,73.95 103.386,74.396 103.386,75.538 101.868,75.538 101.72,75.39
VUSB on Top Layer "VUSB_L01_P014" (solid, pour order 14): 96.29,74.04 96.38,74.13 96.92,74.13 97.02,74.03 97.02,72.601 97.211,72.41 100.73,72.41 101.4,73.08 101.803,73.08 101.803,72.373 101.18,71.75 96.85,71.75 96.29,72.31
NetQ2_3 on Top Layer "NETQ2_3_L01_P013" (solid, pour order 13): 101.68,80.24 101.68,80.15 101.82,80.01 102.924,80.01 103.059,80.145 103.059,80.958 102.935,81.082 101.822,81.082 101.69,80.95
NetQ2_1 on Top Layer "NETQ2_1_L01_P012" (solid, pour order 12): 103.315,80.435 103.25,80.435 103.14,80.325 103.14,79.59 103.275,79.455 104.861,79.455 104.925,79.519 104.925,80.045 104.863,80.106 104.119,80.106 103.79,80.435
VBAT on Top Layer "VBAT_L01_P011" (solid, pour order 11): 103.15,80.65 103.28,80.52 103.84,80.52 104.17,80.19 104.76,80.19 105.03,80.46 105.03,81.553 105.47,81.993 105.47,82.555 105.58,82.665 106.092,82.665 106.272,82.484 106.272,81.67 106.327,81.615 106.85,81.615 106.93,81.696 106.93,83.91 106.86,83.98 104.84,83.98 104.41,83.55 104.41,82.35 103.15,81.09
GND on Top Layer "GND_L01_P010" (solid, pour order 10): 106.17,81.5 106.16,81.51 106.16,82.53 106.1,82.59 105.64,82.59 105.58,82.53 105.58,81.505 105.675,81.41 106.16,81.41 106.16,81.49
GND on Top Layer "GND_L01_P008" (solid, pour order 8): 105.67,80.906 105.867,80.708 106.88,80.701 106.976,80.6 106.98,79.72 106.913,79.621 106.921,77.495 107.039,77.172 107.376,77.169 107.73,76.916 107.734,76.457 107.82,76.345 108.316,76.341 108.426,76.45 108.424,78.272 108.599,78.462 109.868,78.458 109.983,78.571 110.01,81.306 108.63,82.62 107.58,82.63 107.45,82.48 107.44,81.63 107.34,81.54 105.867,81.54 105.67,81.415
NetC3_1 on Top Layer "NETC3_1_L01_P004" (solid, pour order 4): 110.326,77.025 109.62,76.275 108.622,76.237 108.501,76.1 108.494,75.796 108.56,75.64 110.22,75.67
VUSB on Top Layer "VUSB_L01_P007" (solid, pour order 7): 105.05,77.22 105.062,77.971 105.529,78.444 106.762,78.448 106.822,78.495 106.82,79.63 106.88,79.72 106.88,80.58 106.83,80.63 105.99,80.63 105.67,80.34 105.2,80.34 105.01,80.15 105.01,79.18 102.318,77.22
VUSB on Top Layer "VUSB_L01_P006" (solid, pour order 6): 101.09,72.68 101.11,77.23 101.231,77.357 104.85,77.36 105.05,77.22 105.022,75.55 104.931,75.476 103.439,75.469 103.344,75.335 102.84,75.32 101.805,73.975 101.805,72.754 101.72,72.68
NetIC3_6 on Top Layer "NETIC3_6_L01_P005" (solid, pour order 5): 107.47,80.59 107.5,80.63 109.05,80.637 109.083,80.604 109.08,80.17 108.42,79.66 107.52,79.66 107.47,79.7
NetQ1_2 on Top Layer "NETQ1_2_L01_P003" (solid, pour order 3): 105.032,75.4 105.032,75.014 104.86,74.88 103.49,74.88 103.41,74.95 103.41,75.32 103.48,75.41 105.02,75.42
NetIC4_B1 on Top Layer "NETIC4_B1_L01_P001" (solid, pour order 1): 106.83,72.55 107.965,72.55 107.965,75.581 107.855,75.58 106.83,74.52
NetIC4_C1 on Top Layer "NETIC4_C1_L01_P002" (solid, pour order 2): 109.37,72.57 108.215,72.57 108.215,75.734 109.37,74.54
GND on Bottom Layer "GND_L02_P000" (solid, pour order 0): 85.56,79.629 ccw(c99.06,79.629) 99.06,66.129 ccw(c99.06,79.629) 112.56,79.629 ccw(c99.06,79.629) 99.06,93.129 ccw(c99.06,79.629)

## Keep-outs
Keep-Out Layer:
  region: 92.211,91.694 94.226,89.351 90.201,85.939 88.248,88.345

## Other copper
Top Layer:
  region net NetC3_1: 108.56,75.731 108.56,75.64 109.13,75.05 110.45,75.05 110.67,75.25 110.71,81.28 110.58,81.43 110.24,81.43 110.11,81.3 110.089,76.365
  region net NetC2_1: 107.57,75.55 107.002,74.997 105.28,74.99 105.21,75.06 105.25,77.97 105.56,78.28 106.78,78.27 106.84,78.22 106.85,77.46 106.99,77.1 107.38,77.09 107.61,76.91 107.61,75.63
  region net NetC3_2: 108.52,78.27 108.6,78.35 109.87,78.35 109.97,78.28 109.945,76.815 109.56,76.43 108.593,76.407 108.517,76.523
  region net GND: 101.121,78.557 101.11,77.58 101.23,77.47 102.55,77.48 102.62,77.55 102.62,78.564 102.46,78.68 101.339,78.68

## Silkscreen, mask and mechanical layers (free items; w line width, h text height)
Top Overlay:
  lines w0.127: 110.76,80.85 110.77,82.03
  text "CHRG" at 111.552,84.037 h0.76 r108.91
  text "Test" at 111.502,80.72 h0.76 r90
Bottom Overlay:
  text "RST" at 100.6,88.677 h1.52
  text "BOOT" at 108.75,85.337 h1.52
  text "BAT+" at 98.27,75.38 h1.52 r90
  text "BAT-" at 100.8,75.31 h1.52 r90
Mechanical 1:
  circle w0.254: c99.06,79.629 r13.5